# Altium PCB 摄像头识别.PcbDoc
Units mil, origin at the board's own origin, x right, y up, seen from the top; angles counter-clockwise.
Board outline 2675 x 1775 mil, 2 copper layers (Top Layer, Bottom Layer); 30 components, 54 nets, 247 pads, 102 vias.
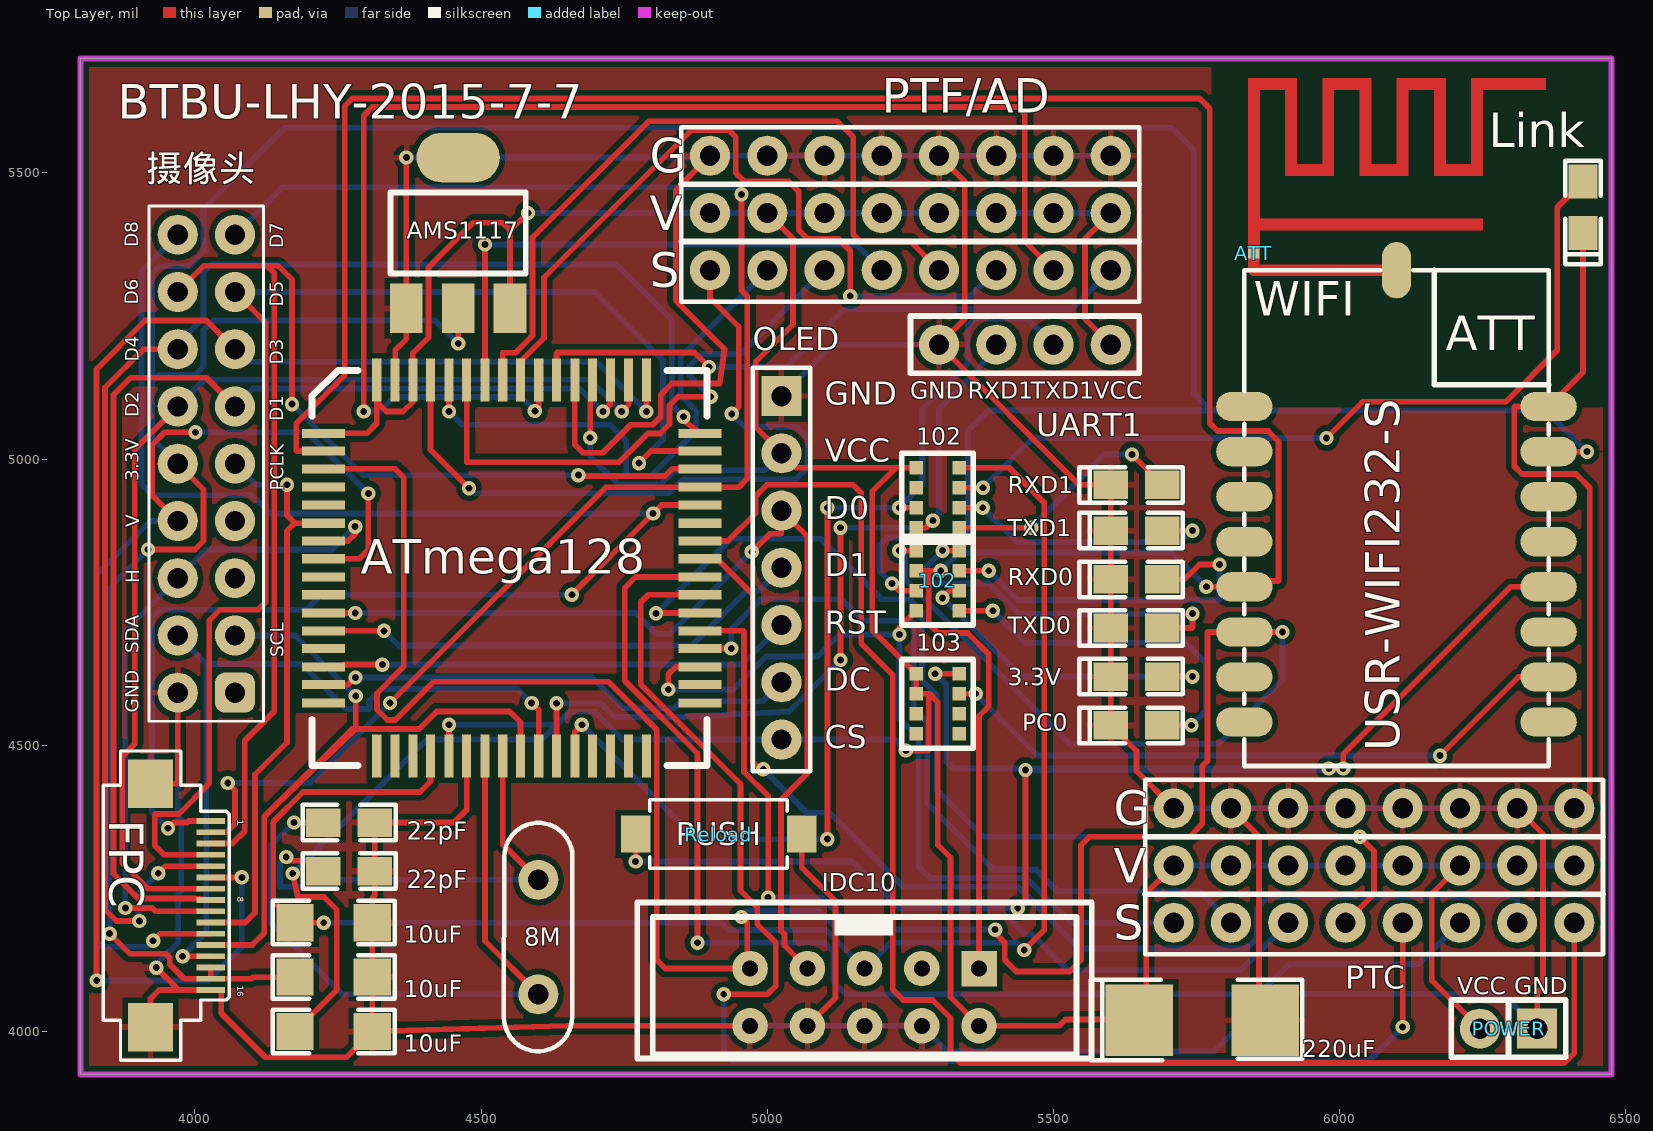
[diagram p0: Top Layer view]
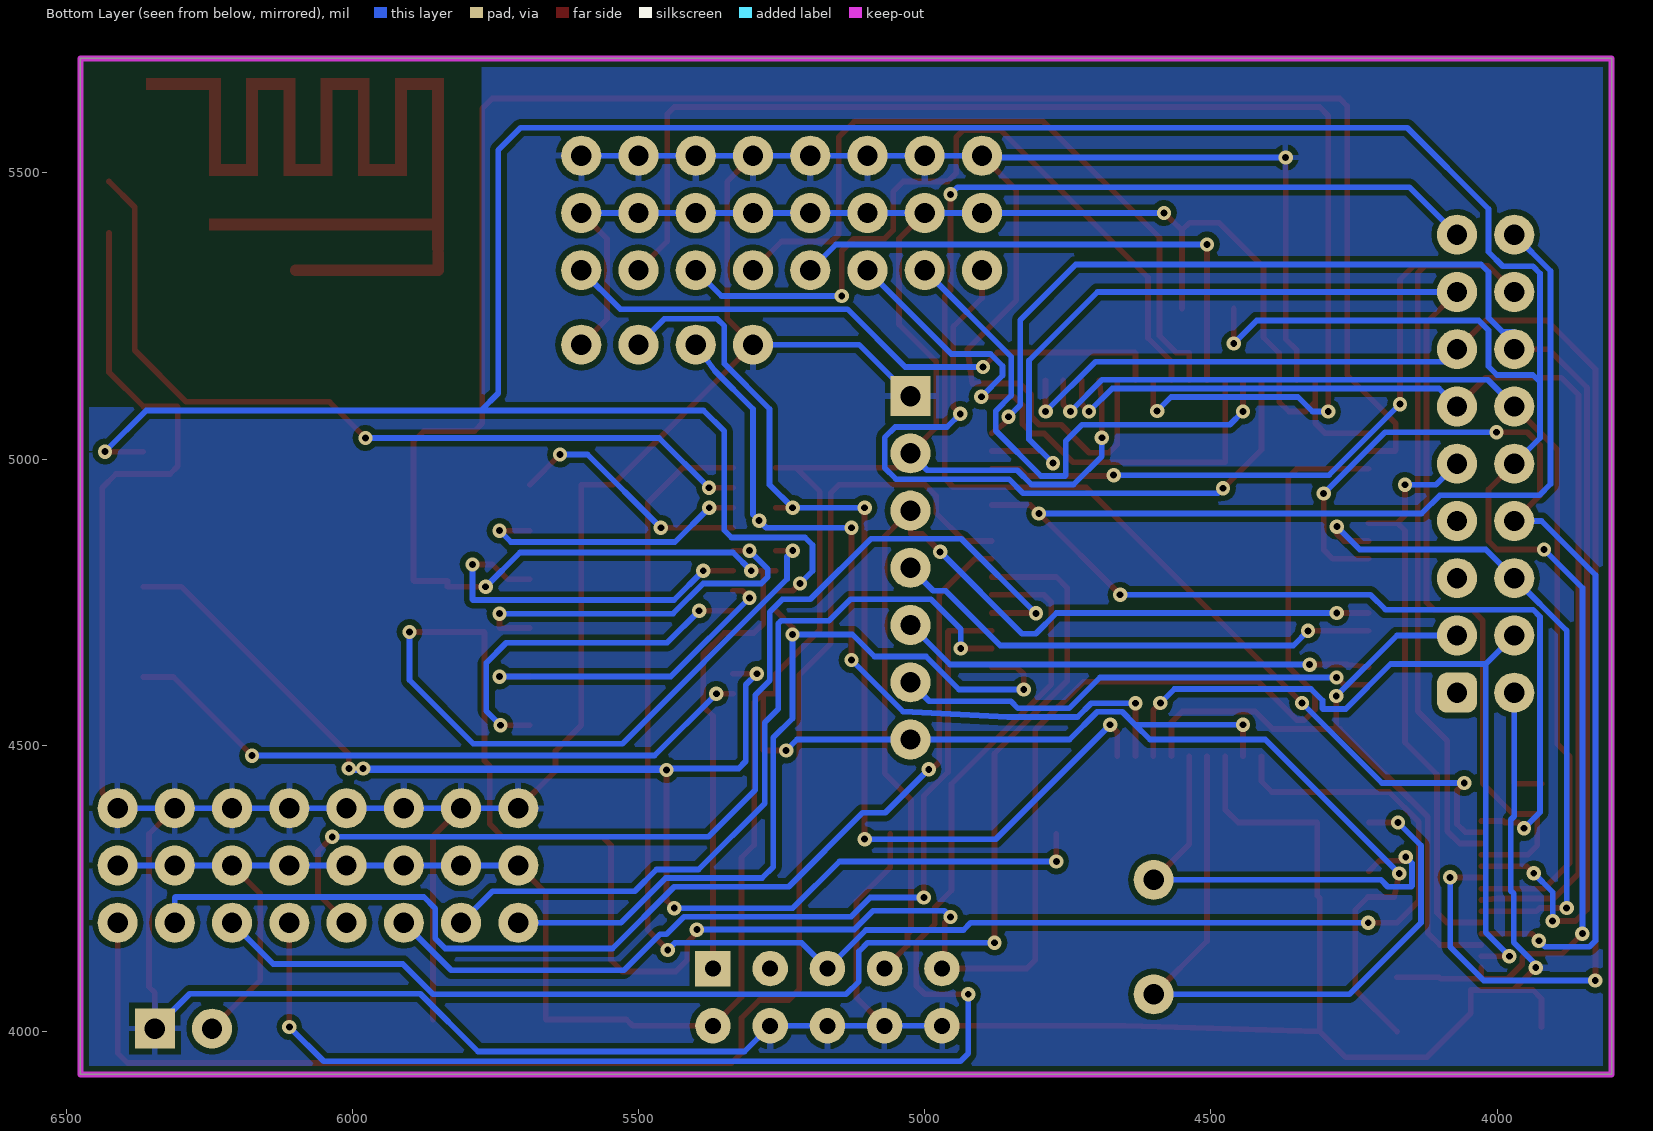
[diagram p1: Bottom Layer view, seen from below]

## Layer stack, top to bottom
Top Solder: solder mask 0.4, Solder Resist, Dk 3.5
Top Layer: signal copper 1.4
Dielectric1: dielectric 12.6, FR-4, Dk 4.8
Bottom Layer: signal copper 1.4
Bottom Solder: solder mask 0.4, Solder Resist, Dk 3.5

## Board outline
3800,3925 6475,3925 6475,5700 3800,5700

## Design rules (kind name [scope] priority, off if disabled: settings)
Clearance via [InPolygon] p1: gap=10
Clearance [All] p2: gap=5
MinimumSolderMaskSliver [All] p1: minsoldermaskwidth=3
NetAntennae NetAntennae_1 [InNet('ANT')] p1: netantennaetolerance=1000
NetAntennae [All] p2: netantennaetolerance=0
PolygonConnect [All] p1: connectstyle=Relief reliefconductorwidth=10 reliefentries=4 polygonreliefangle="90 Angle" airgapwidth=10
RoutingVias [All] p1: holewidth=12 width=25 viastyle="Through Hole" minholewidth=12 minwidth=25 maxholewidth=12 maxwidth=25
SMDNeckDown [All] p1: percent=100.000
SilkToSilkClearance [All] p1: silktosilkclearance=0
SilkToSolderMaskClearance [All] p1: minsilkscreentomaskgap=0 clearancetoexposedcopper=FALSE
SolderMaskExpansion [All] p1: expansion=4
Width Width_1 [InNet('ANT')] p1: maxlimit=30 minlimit=10 preferedwidth=20
Width [All] p2: maxlimit=10 minlimit=5.9 preferedwidth=10
26 further rules are at their usual default settings.

## Components (designator, comment, footprint, x,y, rotation, side; value= is the part's Value field where it differs from the comment)
3.3V "Comment" D0805 5690,4620 r180 top
8M "8M" 8m 4600,4065 r90 top
10uF "10UF" 1206 4310,4190 r180 top
10uF "10UF" 1206 4310,4095 r180 top
10uF "10UF" 1206 4175,4000 r0 top
22pF "22P" C0805 4224,4280 r180 top
22pF "22P" C0805 4224,4365 r180 top
102 "Comment" 排阻0603 5330,4880 r90 top
102 "Comment" 排阻0603 5330,4735 r90 top
103 "Comment" 排阻0603 5330,4520 r90 top
220uF "Comment" 1812 5665,4020 r0 top
AMS1117 "Comment" AMS1117 4460,5395 r0 top
ATmega128 "ATMEGA128L" TQFP64 4225,5045 r0 top
ATT "Comment" 天线 5850,5360 r0 top
FPC "摄像头" FPC 3975,4220 r90 top
IDC10 "IDC10" IDC10 5370,4110 r0 top
Link "Comment" D0805 6425,5485 r270 top
OLED "Comment" OLED 4835,4845 r0 top
PC0 "Comment" D0805 5690,4535 r180 top
POWER "Comment" POWER 6345,4005 r180 top
PTC "" H8X3 5710,4290 r0 top
PTF/AD "Comment" H8X3 4900,5430 r0 top
Reload "Comment" 贴片按键 4915,4345 r0 top
RXD0 "Comment" D0805 5690,4790 r180 top
RXD1 "Comment" D0805 5690,4955 r180 top
TXD0 "Comment" D0805 5690,4705 r180 top
TXD1 "Comment" D0805 5690,4875 r180 top
UART1 "Comment" UART 5520,5045 r90 top
WIFI "Comment" USR-WIFI232-S 6365,5330 r0 top
摄像头 "摄像头" CCD-PZ 3910,4835 r90 top

## Footprints (in the part's own frame and the unit in brackets; to place one, negate y for a bottom-side part, rotate by r counter-clockwise, add the part's x,y. Pads: shape width x height; smd on the part's side, far side on the other; paste and mask are expansions set on the pad)
8m [mil]
  round 70 hole 35.43: 1(0,0) 2(200,0)
  silkscreen extent -99,-60 299,60, body extent -123,-90 323,93, height 138
1206 [mil]
  rect 65x65 smd: 1(0,0) 2(135,0)
  silkscreen extent -39,-38 174,38, body extent -16,-36 150,35, height 37
1812 [mil]
  rect 118.11x125 smd: +(-15,0) -(205,0)
  silkscreen extent -100,-70 270,70, body extent -26,-62 210,64, height 102
AMS1117 [mm]
  oval 3.7x2.2 smd: 0(0,3.348)
  rect 1.45x2.2 smd: 3.3(0,-3.347) GND(-2.3,-3.347) VCC(2.3,-3.347)
  silkscreen extent -3,-1.8 3,1.8, body extent -3.3,-3.57 3.2,3.43, height 1.85
C0805 [mil]
  rect 60x50 smd: 1(0,0) 2(-90,0)
  silkscreen extent -127,-31 36,31, body extent -101,-26 17,29, height 37
CCD-PZ [mil] "2.54间距 18P"
  rrect50% 70x70 hole 35.43: 1(-243,-160)
  round 70 hole 35.43: 2(-243,-60) 3(-143,-160) 4(-143,-60) 5(-43,-160) 6(-43,-60) 7(57,-160) 8(57,-60) 9(157,-160) 10(157,-60) 11(257,-160) 12(257,-60) 13(357,-160) 14(357,-60) 15(457,-160) 16(457,-60) 17(557,-160) 18(557,-60)
  silkscreen extent -293,-210 607,-10, body extent -293,-210 607,-10, height 336
D0805 [mil]
  rect 60x50 smd: +(0,0) GND(90,0)
  silkscreen extent -36,-31 145,31, body extent 5,-25 85,25, height 43
FPC [mm] "0.5间距 抽屉式 16P"
  rect 2.159x2 smd: 0(-5.4,1.338) 0(5.4,1.338)
  rect 0.254x1.25 smd mask+0.05: 1(3.75,-1.338) 2(3.25,-1.338) 3(2.75,-1.338) 4(2.25,-1.338) 5(1.75,-1.338) 6(1.25,-1.338) 7(0.75,-1.338) 8(0.25,-1.338) 9(-0.25,-1.338) 10(-0.75,-1.338) 11(-1.25,-1.338) 12(-1.75,-1.338) 13(-2.25,-1.338) 14(-2.75,-1.338) 15(-3.25,-1.338) 16(-3.75,-1.338)
  silkscreen extent -6.86,-2.16 6.86,3.43, body extent -4.87,-0.63 5.13,3.18, height 0.82
H8X3 [mil]
  round 70 hole 35.43: 0(0,-100) 1(100,-100) 2(200,-100) 3(300,-100) 4(400,-100) 5(500,-100) 6(600,-100) 7(700,-100) GND(0,100) GND(100,100) GND(200,100) GND(300,100) GND(400,100) GND(500,100) GND(600,100) GND(700,100) VCC(0,0) VCC(100,0) VCC(200,0) VCC(300,0) VCC(400,0) VCC(500,0) VCC(600,0) VCC(700,0)
  silkscreen extent -50,-155 750,150, body extent -50,-150 750,150, height 336
IDC10 [mil]
  rect 62x62 hole 28: 1(0,0)
  round 62 hole 28: 2(0,-100) 3(-100,0) 4(-100,-100) 5(-200,0) 6(-200,-100) 7(-300,0) 8(-300,-100) 9(-400,0) 10(-400,-100)
  silkscreen extent -597,-157 197,115, body extent -550,-175 150,75, height 336
OLED [mil] "Connector; Header; 6 Position"
  round 70 hole 35.43: CS(190,-335) D0(190,65) D1(190,-35) DC(190,-235) RST(190,-135) VCC(190,165)
  rect 70x70 hole 35.43: GND(190,265)
  silkscreen extent 140,-390 240,315, body extent 140,-385 240,315, height 336
POWER [mil]
  rect 70x70 hole 35.43: GND(0,0)
  round 70 hole 35.43: VCC(100,0)
  silkscreen extent -50,-50 150,50, body extent -50,-50 150,50, height 336
TQFP64 [mil]
  rect 16x75 smd: AREF(155.8,92.96) AVCC(92.8,92.96) GND(124.8,92.96) GND(249.8,-564.04) GND(438.8,92.96) PA0(500.8,92.96) PA1(532.8,92.96) PA2(563.8,92.96) PB7(92.8,-564.04) PD0(343.8,-564.04) PD1(375.8,-564.04) PD2(406.8,-564.04) PD3(438.8,-564.04) PD4(469.8,-564.04) PD5(500.8,-564.04) PD6(532.8,-564.04) PD7(563.8,-564.04) PF0(186.8,92.96) PF1(218.8,92.96) PF2(249.8,92.96) PF3(281.8,92.96) PF4(312.8,92.96) PF5(343.8,92.96) PF6(375.8,92.96) PF7(406.8,92.96) RESET(186.8,-564.04) TOSC1/1PG4(155.8,-564.04) TOSC2/PG3(124.8,-564.04) VCC(218.8,-564.04) VCC(469.8,92.96) XTAL1(312.8,-564.04) XTAL2(281.8,-564.04)
  rect 75x16 smd: PA3(657.8,-0.04) PA4(657.8,-31.04) PA5(657.8,-62.04) PA6(657.8,-94.04) PA7(657.8,-125.04) PB0(-0.2,-282.04) PB1(-0.2,-314.04) PB2(-0.2,-345.04) PB3(-0.2,-376.04) PB4(-0.2,-408.04) PB5(-0.2,-439.04) PB6(-0.2,-471.04) PC0(657.8,-408.04) PC1(657.8,-376.04) PC2(657.8,-345.04) PC3(657.8,-314.04) PC4(657.8,-282.04) PC5(657.8,-251.04) PC6(657.8,-219.04) PC7(657.8,-188.04) PE0(-0.2,-31.04) PE1(-0.2,-62.04) PE2(-0.2,-94.04) PE3(-0.2,-125.04) PE4(-0.2,-157.04) PE5(-0.2,-188.04) PE6(-0.2,-219.04) PE7(-0.2,-251.04) PEN(-0.2,-0.04) PG0(657.8,-471.04) PG1(657.8,-439.04) PG2(657.8,-157.04)
  silkscreen extent -20,-580 670,110, body extent 15,-550 645,80, height 55
UART [mil]
  round 70 hole 35.43: GND(155,220) RXD(155,120) TXD(155,20) VCC(155,-80)
  silkscreen extent 105,-130 205,270, body extent 105,-130 205,270, height 336
USR-WIFI232-S [mm]
  oval 2.5x1.3 smd: 1(-13.5,-6.051) 2(-13.5,-8.051) 3(-13.5,-10.051) 4(-13.5,-12.051) 7(-13.5,-18.051) 8(-13.5,-20.051) DVDD(0,-8.051) GND(0,-6.051) GPIO9(0,-20.051) NLINK(0,-12.051) READY(0,-16.051) RELOAD(0,-14.051) RESET(0,-18.051) RXD(-13.5,-16.051) TXD(-13.5,-14.051) WPS(0,-10.051)
  oval 1.3x2.5 smd: 17(-6.75,0)
  silkscreen extent -13.5,-22 0,0, body extent -13.46,-21.97 0,0, height 4.2
天线 [mm]
  rect 0.5x0.5 smd: 1(0,0)
  Top Layer region: -0.254,7.747 -0.254,0.127 0.254,0.127 0.254,1.016 10.16,1.016 10.16,1.524 0.254,1.524 0.254,7.239 1.397,7.239 1.397,3.429 3.556,3.429 3.556,7.239 4.699,7.239 4.699,3.429 6.858,3.429 6.858,7.239 8.001,7.239 8.001,3.429 10.16,3.429 10.16,7.239 12.954,7.239 12.954,7.747 9.652,7.747 9.652,3.937 8.509,3.937 8.509,7.747 6.35,7.747 6.35,3.937 5.207,3.937 5.207,7.747 3.048,7.747 3.048,3.937 1.905,3.937 1.905,7.747
排阻0603 [mm]
  rect 0.6x0.6 smd: 1(0,1.778) 2(0,-0.127) 3(0.889,1.778) 4(0.889,-0.127) 5(1.778,1.778) 6(1.778,-0.127) 7(2.667,1.778) 8(2.667,-0.127)
  silkscreen extent -0.64,-0.76 3.3,2.41, body extent -0.25,0 2.92,1.6, height 0.55
贴片按键 [mil]
  rect 51.18x65 smd: 1(145,0) 2(-145,0)
  silkscreen extent -120,-60 120,60, body extent -130,-65 130,61, height 75

## Via types
v1: diameter 25, hole 12, Top Layer to Bottom Layer, tented both sides, 102 vias

## Nets (pads, with @x,y where several pads share a name; then routed paths per layer and width w, separated by ;. In a path a pad name is that pad's centre, name@x,y a point inside that pad or via, vN(x,y) a via of type N, cw(c..) or ccw(c..) an arc to the next point about the centre after c; other vN are vias at no path point)
3.3: 10uF.2@4175,4095 102.3@5260,4770 AMS1117.3.3 FPC.14 FPC.15 WIFI.DVDD 摄像头.10 | length 6493.5
  Top Layer w10: v1(3851,4171) 3886,4136 3949,4136 3956.08,4128.92 3956.08,4117.42 3981.45,4092.05 FPC.15 ; v1(3918,4842) 4000,4842 4015,4857 4015,4947 摄像头.10 ; FPC.14 FPC.15 ; 10uF.2@4175,4095 4101.95,4095 4099,4092.05 FPC.15 ; v1(4460,5202) AMS1117.3.3 ; v1(5218,4782.5) 5230.5,4770 102.3@5260,4770 ; WIFI.DVDD v1(6432,5013.04)
  Bottom Layer w10: v1(3851,4171) 3851,4775 v1(3918,4842) ; 摄像头.10 3925,5037 3925,5134.5 ; v1(4460,5202) 4420,5242 4032,5242 4015,5225 4015,5162 4000,5147 3937.5,5147 3925,5134.5 ; v1(5218,4782.5) 5196,4804.5 5196,4850 5209,4863 5337.5,4863 5350,4875.5 5350,5048.5 5386.5,5085 6360.04,5085 v1(6432,5013.04) ; 5775,5085 5745,5115 5745,5540 5706,5579 4157,5579 4015,5437 4015,5362 3990,5337 3937.5,5337 3925,5324.5 3925,5134.5
ANT: ATT.1 WIFI.17 | length 279.3
  Top Layer w19.68: 5850,5330 ATT.1
  Top Layer w20: 5850,5330 WIFI.17
DATA1: ATmega128.PA0 FPC.8 摄像头.11 | length 2002.6
  Top Layer w10: FPC.8 4000.34,4232.5 3901,4232.5 3857.97,4275.53 3857.97,5112.47 3887.5,5142 4020,5142 摄像头.11 ; v1(4713,5083) 4725.8,5095.8 ATmega128.PA0
  Bottom Layer w10: 摄像头.11 4101.5,5123.5 4672.5,5123.5 v1(4713,5083)
DATA2: ATmega128.PA1 FPC.7 摄像头.12 | length 1888.8
  Top Layer w10: 摄像头.12 3895,5017 3895,4502.5 3872.97,4480.47 3872.97,4294.56 3918,4249.53 FPC.7 ; v1(4745.5,5083) 4757.8,5095.3 ATmega128.PA1
  Bottom Layer w10: 摄像头.12 4016.5,5138.5 4690,5138.5 v1(4745.5,5083)
DATA3: ATmega128.PA2 FPC.6 摄像头.13 | length 2651.7
  Top Layer w10: v1(3828.5,4089) 3827.97,4089.53 3827.97,5156.97 3913,5242 4020,5242 摄像头.13 ; FPC.6 v1(4082,4269.21) ; v1(4788.8,5083) ATmega128.PA2
  Bottom Layer w10: v1(3828.5,4089) 4023.5,4089 4082,4147.5 v1(4082,4269.21) ; 摄像头.13 4070,5170 4701.8,5170 v1(4788.8,5083)
DATA4: ATmega128.PA3 FPC.5 摄像头.14 | length 2578.8
  Top Layer w10: v1(3903,4193) 3863,4193 3842.97,4213.03 3842.97,5124.97 3910,5192 摄像头.14 ; v1(3935.9,4276.4) 3948.4,4288.9 FPC.5 ; v1(4853.5,5074) 4853.5,5067.75 ATmega128.PA3
  Bottom Layer w10: v1(3903,4193) 3903,4243.5 v1(3935.9,4276.4) ; 摄像头.14 3970,5222 3990,5222 4015,5247 4015,5327 4028,5340 4736,5340 4833,5243 4833,5094.5 v1(4853.5,5074)
DATA5: ATmega128.PA4 FPC.4 摄像头.15 | length 2346.3
  Top Layer w10: FPC.4 3946.42,4308.58 3930,4325 3930,4379.1 3931,4380.1 3972,4380.1 4025,4433.1 4025,4718 4044,4737 4110.5,4737 4123.5,4750 4123.5,5238.5 摄像头.15 ; v1(4775.93,4992.96) 4796.93,5013.96 ATmega128.PA4
  Bottom Layer w10: 摄像头.15 4698,5292 4817.8,5172.2 4817.8,5034.83 v1(4775.93,4992.96)
DATA6: ATmega128.PA5 FPC.3 摄像头.16 | length 2299.7
  Top Layer w10: 摄像头.16 4016,5338 4125.5,5338 ; FPC.3 4065.27,4328.27 4087,4350 4087,4508 4138.5,4559.5 4138.5,5325 4125.5,5338 ; v1(4169.5,5096) 4169.5,5313.5 4145,5338 4125.5,5338 ; v1(4670,4972) 4671.54,4970.46 4821.46,4970.46 4833.96,4982.96 ATmega128.PA5
  Bottom Layer w10: v1(4169.5,5096) 4293.5,4972 v1(4670,4972)
DATA7: ATmega128.PA6 FPC.2 摄像头.17 | length 2678.1
  Top Layer w10: FPC.2 4055.45,4347.95 4070,4362.5 4070,4421.5 v1(4057.5,4434) ; v1(4341,4574) 4717.96,4950.96 ATmega128.PA6 4950,4950.96 4965,4965.96 4965,5285 4955,5295 v1(4955,5462.5)
  Bottom Layer w10: v1(4057.5,4434) 4201,4434 v1(4341,4574) ; 摄像头.17 4153,5475 4942.5,5475 v1(4955,5462.5)
DATA8: ATmega128.PA7 FPC.1 摄像头.18 | length 2876.5
  Top Layer w10: v1(3953,4355.14) 3962.96,4365.1 3986.71,4365.1 3989.26,4367.64 FPC.1 ; v1(4658.5,4763) v1(4800.5,4905) 4815.46,4919.96 ATmega128.PA7
  Bottom Layer w10: v1(3953,4355.14) 3925,4383.14 3925,4724.5 3937.5,4737 4195,4737 4221,4763 v1(4658.5,4763) ; 摄像头.18 3906.77,5328.77 3906.77,4956.23 3926,4937 4100,4937 4132,4905 v1(4800.5,4905)
GND: 3.3V.GND 10uF.1@4310,4095 10uF.1@4310,4190 10uF.2@4310,4000 22pF.2 220uF.- AMS1117.GND ATmega128.GND FPC.0 FPC.16 IDC10.4 IDC10.6 IDC10.8 IDC10.10 Link.GND OLED.GND PC0.GND POWER.GND PTC.GND PTF/AD.GND Reload.1 RXD0.GND RXD1.GND TXD0.GND TXD1.GND UART1.GND WIFI.GND 摄像头.2 | length 11359.6
  Top Layer w10: FPC.0@3922.34,4007.4 3922.34,4057.2 3937.5,4072.36 3971.64,4072.36 ; FPC.0@3922.34,4432.6 3969,4432.6 3970,4433.6 摄像头.2 ; v1(3932.5,4111.5) 3971.64,4072.36 ; ATmega128.GND@4349.8,5137.96 4349.8,5190 4369.45,5209.65 v1(4369.45,5527) ; ATmega128.GND@4474.8,4480.96 4474.8,4387.5 4452.3,4365 4314,4365 4314,4280 4314,4237 4310,4233 4310,4190 4310,4095 10uF.2@4310,4000 ; ATmega128.GND@4663.8,5137.96 4663.8,5025 4677.8,5011 4712.5,5011 4761.5,5060 4800,5060 4814,5074 4814,5112.5 4833.5,5132 4916.92,5132 4925.08,5191.92 4840,5277 4840,5470 PTF/AD.GND@4900,5530 ; IDC10.10 4650,4010 10uF.2@4310,4000 ; Reload.1 5060,4287 5119,4228 5119,4059 IDC10.8 ; PTF/AD.GND@5300,5530 5345,5485 5345,5245 UART1.GND 5545,4955 RXD1.GND RXD0.GND TXD0.GND PC0.GND 5645,4490 5645,4455 PTC.GND@5710,4390 ; PTC.GND@5810,4390 5858.85,4341.15 220uF.-@5858.85,4021 ; PTC.GND@6310,4390 6355,4345 6355,4078 6345,4068 POWER.GND ; PTC.GND@6410,4390 6437,4417 6437,4950 6413,4974 6318.5,4974 6305,4987.5 6305,5090.78 6306,5091.78 WIFI.GND 6425,5151.78 Link.GND ; 3971.64,4072.36 FPC.16 4046,4072.36 4046,4032 4123,3955 4265,3955 10uF.2@4310,4000
  Bottom Layer w10: v1(3932.5,4111.5) 3932.5,4117.16 3971,4155.66 3971,4241 3976,4246 3976,4370 3970,4376 摄像头.2 ; v1(4369.45,5527) 4897,5527 4900,5530 5000,5530 5100,5530 5200,5530 5300,5530 5400,5530 5500,5530 PTF/AD.GND@5600,5530 ; IDC10.10 IDC10.8 IDC10.6 IDC10.4 5315,3965 5780.21,3965 5881.21,4066 6284,4066 POWER.GND ; OLED.GND 5115,5200 UART1.GND ; PTC.GND@5710,4390 5810,4390 5910,4390 6010,4390 6110,4390 6210,4390 6310,4390 PTC.GND@6410,4390
HERF: ATmega128.PE5 FPC.9 摄像头.6 | length 1185.8
  Top Layer w10: v1(3878.5,4215.8) 3925.37,4215.8 3931.02,4210.16 FPC.9 ; ATmega128.PE5 4267.46,4856.96 4280,4869.5 v1(4280,4882)
  Bottom Layer w10: v1(3878.5,4215.8) 3878.5,4700.5 摄像头.6 4020,4842 4240,4842 v1(4280,4882)
LED-3.3: 3.3V.+ 102.4@5335,4770 | length 581.1
  Top Layer w10: v1(5306,4757.5) 5318.5,4770 102.4@5335,4770 ; 3.3V.+ v1(5743,4620)
  Bottom Layer w10: v1(5306,4757.5) 5443.5,4620 v1(5743,4620)
LED-LINK: 102.6@5335,4950 Link.+ | length 1458.1
  Top Layer w10: 102.6@5335,4950 v1(5377,4950) ; v1(5977,5037) 6040,5100 6290,5100 6380,5190 6380,5440 Link.+
  Bottom Layer w10: v1(5377,4950) 5464,5037 v1(5977,5037)
LED-PC0: 102.2@5335,4735 PC0.+ | length 639
  Top Layer w10: 102.2@5335,4735 v1(5394,4735) ; PC0.+ v1(5741,4535)
  Bottom Layer w10: v1(5394,4735) 5450,4679 5731,4679 5766,4644 5766,4560 v1(5741,4535)
LED-RXD0: 102.6@5335,4805 RXD0.+ | length 648.3
  Top Layer w10: 102.6@5335,4805 v1(5387,4805) ; RXD0.+ 5729,4790 5755,4816 v1(5790,4816)
  Bottom Layer w10: v1(5387,4805) 5438,4754 5789,4754 5790,4755 v1(5790,4816)
LED-RXD1: 102.2@5335,4880 RXD1.+ | length 430
  Top Layer w10: 102.2@5335,4880 v1(5461,4880) ; v1(5637,5008) RXD1.+
  Bottom Layer w10: v1(5461,4880) 5589,5008 v1(5637,5008)
LED-TXD0: 102.8@5335,4840 TXD0.+ | length 661.1
  Top Layer w10: v1(5306,4840) 102.8@5335,4840 ; TXD0.+ 5742,4705 5743,4706 v1(5743,4730)
  Bottom Layer w10: v1(5306,4840) 5274.1,4808.1 5274.1,4793.9 5285.5,4782.5 5387,4782.5 5439.5,4730 v1(5743,4730)
LED-TXD1: 102.4@5335,4915 TXD1.+ | length 494.1
  Top Layer w10: 102.4@5335,4915 v1(5376.5,4915) ; TXD1.+ v1(5743,4875)
  Bottom Layer w10: v1(5376.5,4915) 5436.5,4855 5723,4855 v1(5743,4875)
MOSI: ATmega128.PB2 OLED.D1 | length 866.9
  Top Layer w10: ATmega128.PB2 v1(4330.5,4699.96)
  Bottom Layer w10: v1(4330.5,4699.96) 4355.96,4674.5 4867.91,4674.5 4963.41,4770 4985,4770 OLED.D1
PB4: ATmega128.PB4 OLED.RST | length 829
  Top Layer w10: ATmega128.PB4 4261.5,4640.96 v1(4327.5,4640.96)
  Bottom Layer w10: v1(4327.5,4640.96) 4955.96,4640.96 OLED.RST
PB5: ATmega128.PB5 OLED.DC | length 846.6
  Top Layer w10: ATmega128.PB5 4268.05,4605.96 v1(4280.55,4618.46)
  Bottom Layer w10: v1(4280.55,4618.46) 4693.83,4618.46 4747.8,4564.5 4837.04,4564.5 4849.5,4576.96 4991.96,4576.96 OLED.DC
PC0: 102.1@5260,4735 ATmega128.PC0 PTC.0 | length 1490.7
  Top Layer w10: v1(4827,4597.46) 4827,4623.96 4840,4636.96 ATmega128.PC0 ; v1(5231,4693.5) 5231,4706 102.1@5260,4735
  Bottom Layer w10: v1(4827,4597.46) 4939.96,4597.46 4997.5,4655 5087.9,4655 5126.4,4693.5 v1(5231,4693.5) 5231,4547 5264.5,4513.5 5264.5,4287.5 5284,4268 5452.5,4268 5530.5,4190 PTC.0
PC1: ATmega128.PC1 PTC.1 | length 1386.9
  Top Layer w10: ATmega128.PC1 v1(4936.96,4668.96)
  Bottom Layer w10: v1(4936.96,4668.96) 4936.96,4702.96 4989,4755 5129.69,4755 5167.19,4717.5 5250.94,4717.5 5255.69,4712.75 5255.69,4563.69 5279.5,4539.88 5279.5,4398.5 5395,4283 5468.53,4283 5506.53,4245 5755,4245 PTC.1
PC2: ATmega128.PC2 PTC.2 | length 1554.7
  Top Layer w10: ATmega128.PC2 4958,4699.96 4959.46,4698.5 4959.46,4453.54 5001.5,4411.5 v1(5001.5,4234)
  Bottom Layer w10: v1(5001.5,4234) 5095,4234 5128.5,4200.5 5420.5,4200.5 5451,4170 5462.5,4170 5525.5,4107 5827,4107 PTC.2
PC3: ATmega128.PC3 PTC.3 | length 1925.3
  Top Layer w10: v1(4805.5,4730.5) 4805.96,4730.96 ATmega128.PC3 ; PTC.3 6060,4240 6060,4315 v1(6035,4340)
  Bottom Layer w10: v1(4805.5,4730.5) 4936,4861 5094,4861 5200,4755 5248.69,4755 5270.69,4733 5270.69,4613.31 5296,4588 5296,4422 5378,4340 v1(6035,4340)
PC4: ATmega128.PC4 PTC.4 | length 2476.1
  Top Layer w10: ATmega128.PC4 4791.92,4762.96 4778.96,4750 4778.96,4606.41 4953,4432.37 4953,4246.28 4982.28,4217 4982.28,4187.72 5015,4155 5015,4080 5000,4065 v1(4924,4065) ; v1(6110,4008) PTC.4
  Bottom Layer w10: v1(4924,4065) 4924,3961.5 4937.5,3948 6050,3948 v1(6110,4008)
PC5: ATmega128.PC5 PTC.5 | length 2264.1
  Top Layer w10: v1(4878,4155) 4878,4485.8 4751,4612.8 4751,4775 4769.96,4793.96 ATmega128.PC5
  Bottom Layer w10: v1(4878,4155) 5100,4155 5115,4140 5115,4087.5 5137.5,4065 5859,4065 5912,4118 6138,4118 PTC.5
PC6: ATmega128.PC6 PTC.6 | length 1993.3
  Top Layer w10: ATmega128.PC6 4912,4825.96 4974.46,4763.5 4974.46,4470.54 4987,4458 v1(4993,4458)
  Bottom Layer w10: v1(4993,4458) 5069,4382 5108.5,4382 5237.5,4253 5437.5,4253 5545.5,4145 5837.5,4145 5855,4162.5 5855,4215 5875,4235 6309,4235 6310,4234 PTC.6
PC7: ATmega128.PC7 PTC.7 | length 2750.3
  Top Layer w10: ATmega128.PC7 4931,4856.96 4980,4905.96 4980,4936 4999,4955 5150,4955 5164,4941 5164,4678 5219.15,4622.85 5219.15,4073.35 5237.5,4055 5288.64,4055 5320,4023.64 5320,3962.5 5337.5,3945 6392.5,3945 6410,3962.5 PTC.7
PCLK: ATmega128.PE4 FPC.10 摄像头.9 | length 1073.6
  Top Layer w10: FPC.10 4088,4190.47 4105,4207.47 4105,4449 4161,4505 4161,4875 4174.48,4888.48 ; v1(4161,4955.23) 4161,4901.96 4174.48,4888.48 ; 4174.48,4888.48 ATmega128.PE4 4175,4887.96 4174.48,4888.48
  Bottom Layer w10: 摄像头.9 4106.77,4955.23 v1(4161,4955.23)
PF0: ATmega128.PF0 PTF/AD.0 | length 1308.1
  Top Layer w10: ATmega128.PF0 4411.8,5016.2 v1(4479,4949) ; PTF/AD.0 4900,5281.62 4949.92,5231.7 4949.92,5090.92 v1(4938,5079)
  Bottom Layer w10: v1(4479,4949) 4487.54,4940.46 4828.43,4940.46 4852.97,4965 5050,4965 5070,4985 5070,5037.5 5051.5,5056 4961,5056 v1(4938,5079)
PF1: ATmega128.PF1 PTF/AD.1 | length 955.5
  Top Layer w10: ATmega128.PF1 4443.8,5083.2 v1(4444,5083)
  Bottom Layer w10: v1(4444,5083) 4467,5060 4725,5060 4753.43,5031.57 4753.43,4972 4754.97,4970.46 4797,4970.46 4876,5049.46 4876,5084 4849,5111 4849,5179 PTF/AD.1
PF2: ATmega128.PF2 PTF/AD.2 | length 1010.3
  Top Layer w10: ATmega128.PF2 4475,4994.5 4740.81,4994.5 4790.99,5044.68 4812.5,5044.68 4829,5061.18 4829,5094 4844,5109 v1(4901,5109)
  Bottom Layer w10: v1(4901,5109) 4864,5146 4864,5162.5 4885,5183.5 4953.5,5183.5 PTF/AD.2
PF3: ATmega128.PF3 PTF/AD.3 | length 948.9
  Top Layer w10: ATmega128.PF3 v1(4506.8,5375)
  Bottom Layer w10: v1(4506.8,5375) 5155,5375 PTF/AD.3
PF4: ATmega128.PF4 PTF/AD.4 | length 1284.8
  Top Layer w10: ATmega128.PF4 4537.8,5185 4538.8,5186 4560.54,5186 4590,5215.46 4590,5387 4793,5590 5122.5,5590 5150,5562.5 5150,5392.5 5162.5,5380 5250,5380 PTF/AD.4
PF5: ATmega128.PF5 PTF/AD.5 | length 1354.5
  Top Layer w10: ATmega128.PF5 4568.8,5170.26 4610,5211.46 4610,5317.5 4867.5,5575 4932.5,5575 4945,5562.5 4945,5500 4960,5485 5037.5,5485 5055,5467.5 5055,5400 5070,5385 5124,5385 5145,5364 v1(5145,5285)
  Bottom Layer w10: v1(5145,5285) 5355,5285 PTF/AD.5
PF6: ATmega128.PF6 PTF/AD.6 | length 2353.1
  Top Layer w10: v1(4295,5083) 4295,5600 4310,5615 5437.5,5615 5450,5602.5 5450,5380 PTF/AD.6 ; v1(4594,5084) 4600.8,5090.8 ATmega128.PF6
  Bottom Layer w10: v1(4295,5083) 4322.61,5083 4348.11,5108.5 4569.5,5108.5 v1(4594,5084)
PF7: ATmega128.PF7 PTF/AD.7 | length 1096.3
  Top Layer w10: ATmega128.PF7 4631.8,5185.09 4633,5186.3 4872.7,5186.3 v1(4898,5161)
  Bottom Layer w10: v1(4898,5161) 5034,5161 5135,5262 5532,5262 PTF/AD.7
RESET: 10uF.2@4175,4190 102.8@5335,4985 ATmega128.RESET IDC10.5 | length 2841.3
  Top Layer w10: v1(4225,4190) 4175,4190 4137,4228 4137,4366.5 4188.96,4418.46 4393.26,4418.46 4411.8,4437 ATmega128.RESET ; 102.8@5335,4985 5422.84,4985 5484,4923.84 5484,4177.5 v1(5449,4142.5)
  Bottom Layer w10: v1(4225,4190) 4919.83,4190 4932.42,4177.42 5102.58,4177.42 IDC10.5 5215,4155 5436.5,4155 v1(5449,4142.5)
RXD0: 102.5@5260,4805 ATmega128.PE0 IDC10.1 WIFI.TXD | length 4593
  Top Layer w10: ATmega128.PE0 4178,5013.96 4177,5014.96 4177,5061.96 4262,5146.96 4262,5617 4275,5630 5755.5,5630 5773,5612.5 5773,5062.5 5786.5,5049 5875,5049 5893,5031 5893,4788 5892,4787 5833.5,4787 WIFI.TXD 5767.18,4776.82 v1(5767,4777) ; 102.5@5260,4805 5281,4805 ; v1(5303,4805) 5281,4805 ; IDC10.1 5370,4551 5387,4568 5387,4659 5350,4696 5298.5,4696 5282,4712.5 5282,4804 5281,4805
  Bottom Layer w10: v1(5303,4805) 5335,4837 5707,4837 v1(5767,4777)
RXD1: 102.1@5260,4880 ATmega128.PD2 UART1.RXD | length 1418.6
  Top Layer w10: ATmega128.PD2 v1(4631.8,4573.5) ; v1(5128,4649) v1(5128,4880) ; 102.1@5260,4880 5276.81,4880 v1(5289.31,4892.5)
  Bottom Layer w10: v1(4631.8,4573.5) 4709.01,4573.5 4733.01,4549.5 4855,4549.5 5038,4559 v1(5128,4649) ; v1(5128,4880) 5276.81,4880 v1(5289.31,4892.5) 5300,4903.19 5300,5087.58 5366.91,5154.49 UART1.RXD
SCL: ATmega128.PD0 FPC.12 摄像头.3 | length 1430.1
  Top Layer w10: FPC.12 4100,4151.1 4121,4172.1 4121,4375 ; v1(4281,4586) 4281,4528.5 ; ATmega128.PD0 4568.8,4540.2 4550,4559 4422.5,4559 4392,4528.5 4281,4528.5 ; 4121,4375 4274.5,4528.5 4281,4528.5 ; 4121,4375 4281,4528.5
  Bottom Layer w10: 摄像头.3 4175,4692 v1(4281,4586)
SDA: ATmega128.PD1 FPC.13 摄像头.4 | length 1379.4
  Top Layer w10: v1(3978.58,4131.42) FPC.13 ; v1(4588.3,4574) 4600.8,4561.5 ATmega128.PD1
  Bottom Layer w10: 摄像头.4 4020,4642 ; v1(3978.58,4131.42) 4020,4172.84 4020,4642 ; v1(4588.3,4574) 4563.8,4598.5 4325,4598.5 4305,4578.5 4305,4564.5 4304,4563.5 4264.5,4563.5 4186,4642 4020,4642
SPI-SCK: ATmega128.PB1 IDC10.7 OLED.D0 | length 1783.7
  Top Layer w10: ATmega128.PB1 v1(4280.04,4731) v1(4280.04,4731) ; v1(4973,4838) 5004.5,4869.5 5024,4869.5 OLED.D0 5070,4865 5070,4451 5024,4405 5024,4176 5030,4170 5030,4150 IDC10.7
  Bottom Layer w10: v1(4280.04,4731) 4770,4731 4806,4695 4830,4695 v1(4973,4838)
TXD0: 102.7@5260,4840 ATmega128.PE1 IDC10.9 WIFI.RXD | length 4356.3
  Top Layer w10: ATmega128.PE1 4350,4982.96 4365,4967.96 4365,4637.5 4318,4590.5 4318,4562.5 4336.5,4544 4350,4544 4417,4611 4722.8,4611 4806.8,4527 4806.8,4125 4821.8,4110 IDC10.9@4965,4110 ; v1(4955,4200) 4965,4190 IDC10.9@4965,4110 ; IDC10.9 IDC10.9@4965,4110 ; v1(5230.57,4840) 102.7@5260,4840 ; v1(5398,4178) 5398,4172 5415,4155 5415,4125 5435,4105 5528,4105 5548,4125 5548,4325.5 5562.5,4340 5737.5,4340 5760,4362.5 5760,4464 5769,4473 5769,4697.08 5770,4698.08 WIFI.RXD 5899.92,4698.08 v1(5900,4698)
  Bottom Layer w10: v1(4955,4200) 4966,4211 5090.21,4211 5123.21,4178 v1(5398,4178) ; v1(5230.57,4840) 5240.69,4829.88 5240.69,4790.31 5528.5,4502.5 5788.5,4502.5 5900,4614 v1(5900,4698)
TXD1: 102.3@5260,4915 ATmega128.PD3 UART1.TXD | length 1846.7
  Top Layer w10: ATmega128.PD3 4663.8,4523.8 v1(4676,4536) ; v1(5105,4336) v1(5105,4915) ; v1(5230.69,4915) 102.3@5260,4915
  Bottom Layer w10: v1(4676,4536) 4876,4336 v1(5105,4336) ; v1(5105,4915) v1(5230.69,4915) 5271,4955.31 5271,5087.5 5350,5166.5 5350,5232.5 5362.5,5245 5455,5245 UART1.TXD
VCC: 10uF.1@4175,4000 102.7@5260,4985 103.5 103.7 220uF.+ AMS1117.VCC ATmega128.AREF ATmega128.AVCC ATmega128.PEN ATmega128.VCC IDC10.2 OLED.CS OLED.VCC POWER.VCC PTC.VCC PTF/AD.VCC UART1.VCC | length 8054.5
  Top Layer w10: v1(4171,4276) 4180,4235 4225.5,4235 4248,4212.5 4248,4073 10uF.1@4175,4000 ; ATmega128.PEN 4300.26,5044.96 4317.8,5062.5 4317.8,5100 ; ATmega128.AVCC 4317.8,5100 ; ATmega128.VCC@4443.8,4480.96 v1(4443.8,4535.96) ; AMS1117.VCC 4550.55,5400 ; v1(4582,5430) 4550.55,5400 ; v1(4690.5,5037.3) 4690.5,5101.2 ATmega128.VCC@4694.8,5137.96 ; PTF/AD.VCC@5000,5430 5045,5385 5045,5235.31 4980,5170.31 4980,5055 OLED.VCC 5050,4985 5225,4985 ; v1(5242,4491) 5281,4491 5282,4492 5282,4589 5281,4590 ; 102.7@5260,4985 5225,4985 ; UART1.VCC 5555,5245 5555,5385 PTF/AD.VCC@5600,5430 ; PTC.VCC@5710,4290 5662,4242 5662,4021 5521,4021 5510,4010 IDC10.2 5320,4060 5320,4304 5298,4326 5298,4575 5283,4590 5281,4590 ; PTC.VCC@6210,4290 6161,4241 6161,4089 POWER.VCC ; 4317.8,5100 4334.8,5083 4363.8,5083 4380.8,5100 ATmega128.AREF 4380.8,5185.3 4408,5212.5 4408,5335 4486,5413 4537.55,5413 4550.55,5400 ; 5225,4985 5183.19,4943.19 5183.19,4701.81 103.7 103.5 5281,4590
  Bottom Layer w10: v1(4171,4276) 4405,4510 4606.5,4510 4632.46,4535.96 ; v1(4443.8,4535.96) 4632.46,4535.96 ; v1(4582,5430) 4900,5430 5000,5430 5100,5430 5200,5430 5300,5430 5400,5430 5500,5430 PTF/AD.VCC@5600,5430 ; v1(4690.5,5037.3) 4690.5,5004.93 4739.97,4955.46 4813.43,4955.46 4838.43,4980.46 4995.46,4980.46 OLED.VCC ; v1(5242,4491) 5223,4510 OLED.CS 4747.01,4510 4698.51,4558.5 4655,4558.5 4632.46,4535.96 ; PTC.VCC@5710,4290 5810,4290 5910,4290 6010,4290 6110,4290 6210,4290 6310,4290 PTC.VCC@6410,4290
VSYNC: ATmega128.PE6 FPC.11 摄像头.8 | length 1799.5
  Top Layer w10: v1(3927,4158.5) 3939.29,4170.79 FPC.11 ; 摄像头.8 3925,4937 3925,5024.5 3947.5,5047 v1(4001,5047) ; ATmega128.PE6 4287.5,4825.96 4303,4841.46 v1(4303,4940)
  Bottom Layer w10: v1(3927,4158.5) 3916.5,4148 3838.5,4148 3828,4158.5 3828,4797.5 3922.5,4892 摄像头.8 ; v1(4001,5047) 4196,5047 v1(4303,4940)
WIFI-LINK: 102.5@5260,4950
WIFI-RELOAD: 103.8 Reload.2 WIFI.RELOAD | length 2960.2
  Top Layer w10: v1(4770,4297) Reload.2 ; v1(5293.19,4625) 103.8 ; v1(5437.5,4215.5) 5451,4229 v1(5451,4457) ; v1(5981.04,4459.5) 6003.54,4457 v1(6006.04,4459.5) 6006.04,4484.5 6298.36,4776.82 WIFI.RELOAD
  Bottom Layer w10: v1(4770,4297) 5149,4297 5230.5,4215.5 v1(5437.5,4215.5) ; v1(5293.19,4625) 5312.5,4605.69 5312.5,4472 5325,4459.5 v1(5981.04,4459.5) ; v1(5451,4457) 6003.54,4457 v1(6006.04,4459.5)
WIFI-RESET: 103.6 WIFI.RESET | length 1131.6
  Top Layer w10: 103.6 v1(5364,4590) ; v1(6175.16,4482) 6312.5,4619.34 WIFI.RESET
  Bottom Layer w10: v1(5364,4590) 5472,4482 v1(6175.16,4482)
XTAL1: 8M.2 22pF.1@4224,4280 ATmega128.XTAL1 | length 831.6
  Top Layer w10: v1(4159.5,4305) 4159.5,4300 4161,4298.5 4205.5,4298.5 22pF.1@4224,4280 ; ATmega128.XTAL1 4537.8,4327.2 8M.2
  Bottom Layer w10: v1(4159.5,4305) 4148.5,4294 4148.5,4254.52 4150,4253.02 4191,4253.02 4202.98,4265 8M.2
XTAL2: 8M.1 22pF.1@4224,4365 ATmega128.XTAL2 | length 1215.9
  Top Layer w10: v1(4173,4365) 22pF.1@4224,4365 ; ATmega128.XTAL2 4506.8,4158.2 8M.1
  Bottom Layer w10: v1(4173,4365) 4133,4325 4133,4190 4258,4065 8M.1
pads on no net: 103.1 103.2 103.3 103.4 AMS1117.0 ATmega128.PB0 ATmega128.PB3 ATmega128.PB6 ATmega128.PB7 ATmega128.PD4 ATmega128.PD5 ATmega128.PD6 ATmega128.PD7 ATmega128.PE2 ATmega128.PE3 ATmega128.PE7 ATmega128.PG0 ATmega128.PG1 ATmega128.PG2 ATmega128.TOSC1/1PG4 ATmega128.TOSC2/PG3 IDC10.3 WIFI.1 WIFI.2 WIFI.3 WIFI.4 WIFI.7 WIFI.8 WIFI.GPIO9 WIFI.NLINK WIFI.READY WIFI.WPS 摄像头.1 摄像头.5 摄像头.7

## Polygon pours and split planes (outlines as drawn)
GND on Top Layer "VCC-No Net" (solid, pour order 6): 3800.29,5699.71 3800.29,3924.71 6475.29,3924.71 6475.29,5089.71 5775.29,5089.71 5775.29,5699.71
GND on Bottom Layer "VCC-No Net" (solid, pour order 11): 3798.82,5700.59 3798.82,3925.59 6473.82,3925.59 6473.82,5090.59 5773.82,5090.59 5773.82,5700.59

## Keep-outs
Keep-Out Layer:
  the board outline again, w10

## Silkscreen, mask and mechanical layers (free items; w line width, h text height)
Top Overlay:
  text "BTBU-LHY-2015-7-7" at 3865,5595 h60
  text "GND" at 5250,5105 h30
  text "RXD1" at 5350,5105 h30
  text "TXD1" at 5460,5105 h30
  text "VCC" at 5570,5105 h30
  text "GND" at 5100,5095 h40
  text "VCC" at 5100,4995 h40
  text "D0" at 5100,4895 h40
  text "D1" at 5100,4795 h40
  text "RST" at 5100,4695 h40
  text "DC" at 5100,4595 h40
  text "CS" at 5100,4495 h40
  text "S" at 5605,4160 h60
  text "VCC" at 6205,4065 h30
  text "GND" at 6305,4065 h30

## Text inside footprints (layer, text, board x,y; h text height)
FPC: Top Overlay "1" at 4070,4370 h20 r270; Top Overlay "8" at 4070,4235 h20 r270; Top Overlay "16" at 4070,4080 h20 r270
PTC: Top Overlay "S" at 5605,4160 h60; Top Overlay "V" at 5605,4260 h60; Top Overlay "G" at 5605,4360 h60
PTF/AD: Top Overlay "G" at 4795,5500 h60; Top Overlay "V" at 4795,5400 h60; Top Overlay "S" at 4795,5300 h60
Reload: Top Overlay "PUSH" at 4840,4325 h40
WIFI: Top Overlay "USR-WIFI232-S" at 6105,4490 h60 r90; Top Overlay "ATT" at 6185,5190 h60
摄像头: Top Overlay "SDA" at 3910,4661 h40 r90; Top Overlay "GND" at 3910,4557 h40 r90; Top Overlay "3.3V" at 3910,4961 h40 r90; Top Overlay "H" at 3910.43,4783 h40 r90; Top Overlay "V" at 3910.43,4881 h40 r90; Top Overlay "D2" at 3909.43,5073 h40 r90; Top Overlay "D8" at 3909,5370 h40 r90; Top Overlay "D4" at 3909.43,5170 h40 r90; Top Overlay "D6" at 3909,5270 h40 r90; Top Overlay "SCL" at 4163,4654 h40 r90; Top Overlay "D3" at 4162,5165 h40 r90; Top Overlay "PCLK" at 4163,4945 h40 r90; Top Overlay "D1" at 4162.43,5066 h40 r90; Top Overlay "D5" at 4162,5266 h40 r90; Top Overlay "D7" at 4162.43,5368 h40 r90